# Altium PCB waffling60-MX.PcbDoc (part 2 of 2)
Units mm, origin at the board's own origin, x right, y up, seen from the top; angles counter-clockwise.
Board outline 284.81 x 94.3 mm, 2 copper layers (Component Side, Bottom Layer), stack 1.571 mm thick; 157 components, 101 nets, 791 pads, 59 vias.
Unrouted connection lines stored in the file: 52.
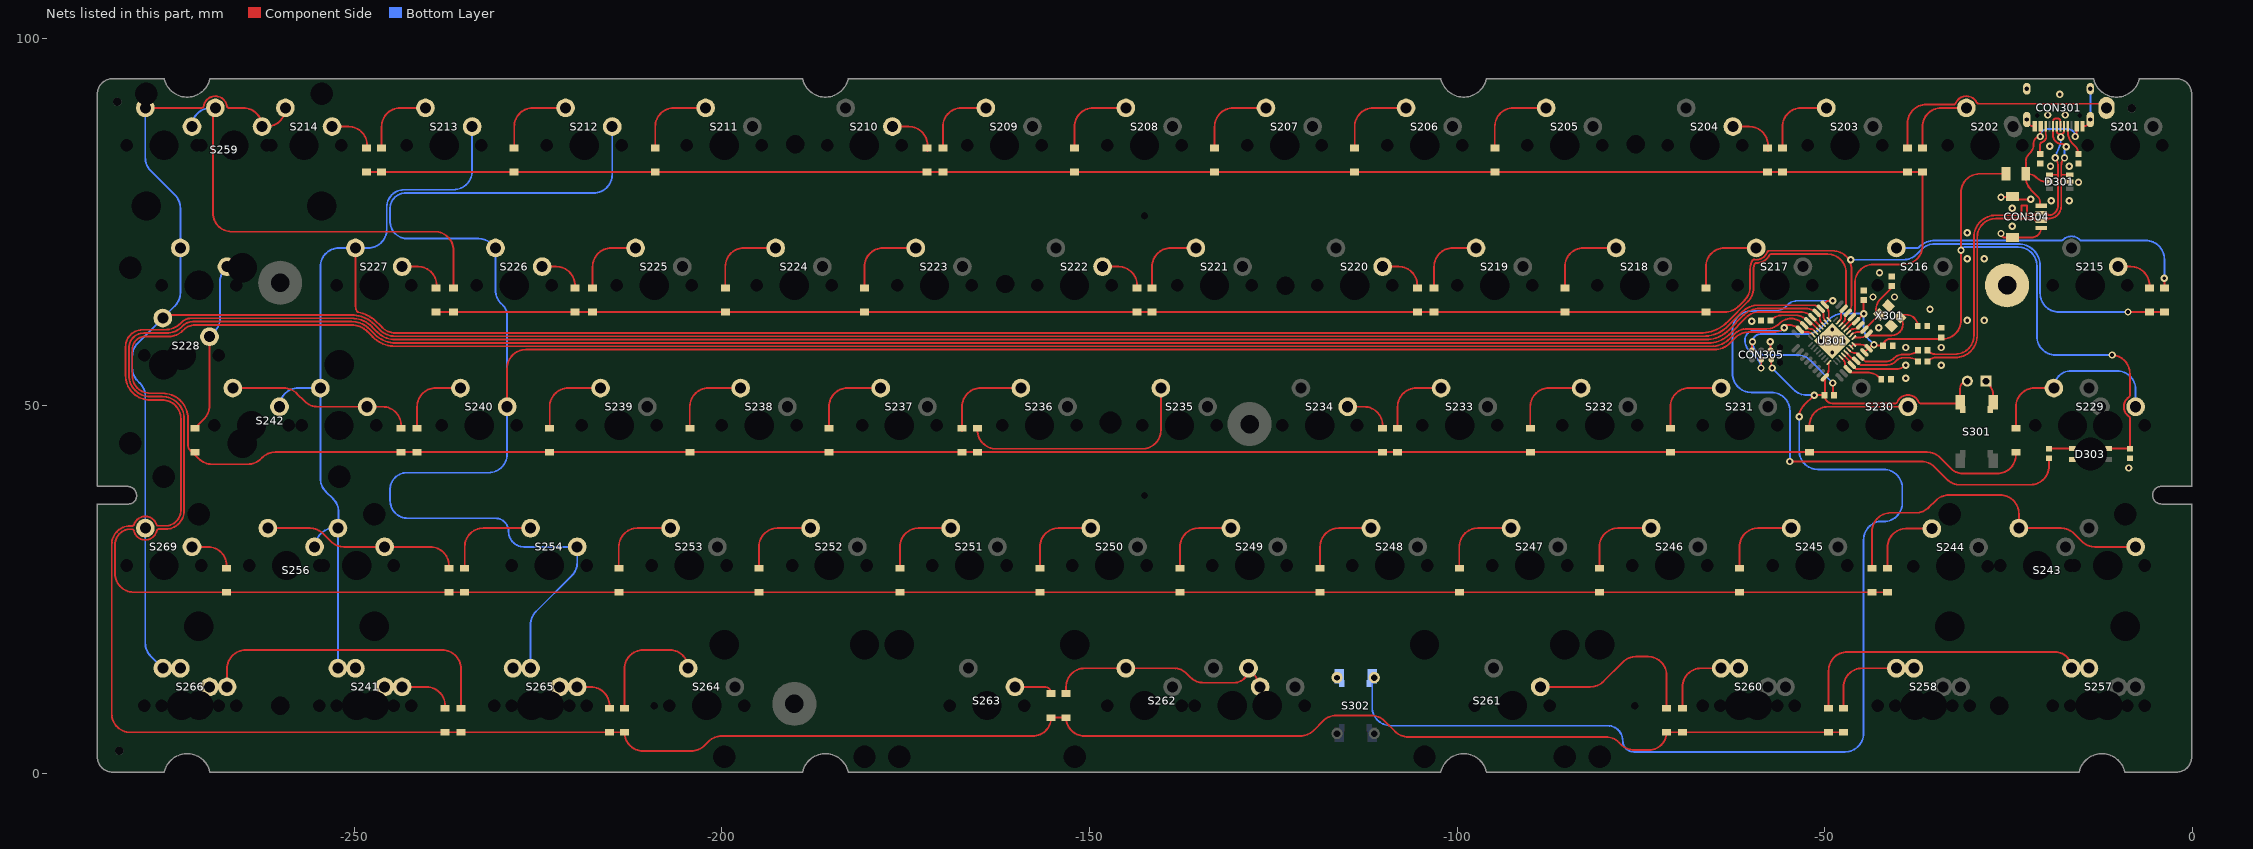
[diagram p2: the nets of this part, all layers, seen from the top]

## Via types
v1: diameter 1, hole 0.5, Component Side to Bottom Layer, tented both sides, 54 vias
v2: diameter 1, hole 0.5, Component Side to Bottom Layer, tented bottom, 5 vias

## Nets (pads, with @x,y where several pads share a name; then routed paths per layer and width w, separated by ;. In a path a pad name is that pad's centre, name@x,y a point inside that pad or via, vN(x,y) a via of type N, cw(c..) or ccw(c..) an arc to the next point about the centre after c; other vN are vias at no path point) (continued)
col12: CON305.3 S212.2 S226.2 S240.2 S254.2 S265.2 U301.15 | length 351.6
  Component Side w0.254: S240.2@-229.177,49.855 -229.177,55.084 cw(c-226.637,55.084) -226.637,57.624 -65.014,57.624 ccw(c-65.014,60.618) -62.898,58.5 ; -62.897,58.501 -62.143,59.255 cw(c-60.349,57.461) -60.349,59.998 -56.902,59.998 ccw(c-56.902,61.982) v1(-55.499,60.579) ; v1(-58.674,55.118) -58.627,55.165 CON305.3@-58.627,56.261 ; v1(-55.499,60.579) cw(c-55.118,60.579) -55.118,60.96 -54.833,60.96 cw(c-54.833,58.889) U301.15@-53.368,60.353 ccw(c-52.555,61.167) -52.555,60.017 -52.324,60.017 cw(c-52.324,59.163) -51.721,59.767 U301.15@-51.565,59.611
  Bottom Layer w0.254: S265.2@-226.002,14.295 -226.002,20.215 cw(c-223.462,20.215) -225.258,22.011 -220.396,26.873 ccw(c-222.192,28.669) -219.652,28.669 S254.2@-219.652,30.805 -226.893,30.805 cw(c-226.893,32.893) -228.981,32.893 ccw(c-230.781,32.893) -230.781,34.693 -242.696,34.693 cw(c-242.696,37.094) -243.383,34.793 cw(c-242.696,37.094) -244.997,36.407 cw(c-242.696,37.094) -245.097,37.094 -245.097,38.598 cw(c-242.808,38.598) -245.033,39.137 cw(c-242.808,38.598) -243.347,40.823 cw(c-242.808,38.598) -242.808,40.887 -231.717,40.887 ccw(c-231.717,43.427) -229.177,43.427 S240.2@-229.177,49.855 -229.177,62.262 ccw(c-231.108,62.262) -229.743,63.627 -230.021,63.905 cw(c-228.225,65.701) -230.765,65.701 S226.2@-230.765,71.445 -231.298,71.978 ccw(c-233.094,70.182) -233.094,72.722 -242.752,72.722 cw(c-242.752,75.067) -243.364,72.803 cw(c-242.752,75.067) -245.016,74.455 cw(c-242.752,75.067) -245.097,75.067 -245.097,76.825 cw(c-243.006,76.825) -245.076,77.123 cw(c-243.006,76.825) -243.304,78.895 cw(c-243.006,76.825) -243.006,78.916 -217.43,78.916 ccw(c-217.43,81.456) -214.89,81.456 S212.2@-214.89,87.955 ; v1(-58.674,55.118) ccw(c-60.497,55.118) -59.208,56.407 -60.245,57.444 cw(c-58.76,58.928) -60.86,58.928 cw(c-59.601,58.928) -59.601,60.187 -55.891,60.187 v1(-55.499,60.579)
col13: S213.2 S227.2 S241.2 S242.2 S256.2 U301.7 | length 329.5
  Component Side w0.254: S227.2@-249.815,71.445 -249.815,63.76 ccw(c-247.523,63.76) -249.631,62.861 ccw(c-249.397,62.96) -249.444,62.71 cw(c-250.332,57.983) -247.314,61.728 ; -247.294,61.747 -246.185,60.638 ccw(c-244.389,62.434) -244.389,59.894 -66.895,59.894 ccw(c-66.895,65.158) -63.172,61.436 -60.434,64.174 ccw(c-62.23,65.97) -59.69,65.97 -59.69,68.526 cw(c-57.604,68.526) -59.569,69.226 cw(c-59.33,69.14) -59.328,69.394 ccw(c-59.315,71.445) -57.506,70.478 cw(c-57.282,70.358) -57.281,70.612 -49.632,70.612 cw(c-49.632,68.072) -47.092,68.072 -47.092,63.995 cw(c-48.242,63.995) -47.428,63.182 ccw(c-46.615,62.369) -47.765,62.369 -47.765,62.103 cw(c-48.535,62.103) -47.991,61.559 U301.7@-48.171,61.379
  Bottom Layer w0.254: S242.2@-260.14,49.855 cw(c-257.6,49.855) -257.6,52.395 S242.2@-254.584,52.395 ; S256.2@-255.27,30.805 cw(c-252.73,30.805) -252.73,33.345 S256.2@-252.095,33.345 ; S241.2@-252.196,14.295 -252.196,33.244 cw(c-252.095,33.244) S256.2@-252.095,33.345 ; S213.2@-233.94,87.955 -233.94,81.91 cw(c-236.48,81.91) -236.48,79.37 -243.194,79.37 ccw(c-243.194,77.013) -243.489,79.351 ccw(c-243.194,77.013) -245.532,77.308 ccw(c-243.194,77.013) -245.551,77.013 -245.551,73.985 cw(c-248.091,73.985) -248.091,71.445 S227.2@-249.815,71.445 -252.044,71.445 ccw(c-252.044,68.905) -254.584,68.905 S242.2@-254.584,52.395 ; S242.2@-254.584,52.395 -254.584,40.117 ccw(c-252.044,40.117) -253.84,38.321 -252.839,37.32 cw(c-254.635,35.524) -252.095,35.524 S256.2@-252.095,33.345
col14: S214.2 S228.2 S259.2 S266.2 S269.2 U301.10 | length 335.5
  Component Side w0.254: S259.2@-278.39,90.495 -272.542,90.495 -270.698,90.495 ccw(c-270.698,90.749) -270.447,90.714 cw(c-268.865,90.495) -270.403,90.924 cw(c-268.865,90.495) -268.362,92.011 cw(c-268.865,90.495) -268.36,92.01 cw(c-268.865,90.495) -267.283,90.714 ccw(c-267.032,90.749) -267.032,90.495 -265.055,90.495 cw(c-265.055,87.955) S259.2@-262.515,87.955 -261.88,87.955 ccw(c-261.88,90.495) S214.2@-259.34,90.495 ; S228.2@-276.009,61.92 -275.59,62.339 -250.332,62.339 cw(c-250.332,57.983) -247.252,61.063 -246.506,60.317 ; -246.505,60.316 ccw(c-244.389,62.434) -244.389,59.44 -66.518,59.44 ccw(c-66.518,64.25) -63.119,60.847 ccw(c-66.518,64.25) -63.117,60.849 -61.209,62.757 ; -61.209,62.757 cw(c-59.017,60.565) -59.017,63.665 -51.706,63.665 cw(c-51.706,62.015) U301.10@-50.54,63.182 cw(c-51.444,62.277) -50.165,62.277 -50.165,62.103 ccw(c-49.304,62.103) -49.913,61.494 U301.10@-49.797,61.379
  Bottom Layer w0.254: S259.2@-278.39,90.495 -278.39,83.735 ccw(c-275.85,83.735) -277.646,81.939 -274.371,78.664 cw(c-276.167,76.868) -273.627,76.868 S228.2@-273.627,71.445 -273.627,65.353 cw(c-276.167,65.353) -274.371,63.557 S228.2@-276.009,61.92 -279.418,58.511 ccw(c-277.622,56.715) -280.162,56.715 -280.162,55.154 ccw(c-277.622,55.154) -279.418,53.358 -279.134,53.074 cw(c-280.93,51.278) -278.39,51.278 S269.2@-278.39,33.345 -278.39,17.729 ccw(c-275.85,17.729) -277.646,15.933 S266.2@-276.008,14.295
D_N: CON301.A7 CON301.B7 CON304.2 D301.4 R305.2 | length 52.4
  Component Side w0.254: R305.2@-36.001,57.531 -35.851,57.381 ccw(c-34.925,58.308) -34.925,56.998 -32.258,56.998 ccw(c-32.258,59.538) -29.718,59.538 -29.718,72.899 cw(c-26.721,72.899) -26.721,75.897 -23.368,75.897 -23.241,75.897 -23.241,77.243 -22.479,77.243 -22.479,75.897 -21.971,75.897 -21.476,75.897 cw(c-21.205,75.897) -21.205,76.168 CON304.2@-20.574,76.168 -19.943,76.168 cw(c-19.943,75.897) -19.672,75.897 -19.558,75.897 ccw(c-19.558,77.167) -18.288,77.167 -18.288,81.407 -18.29,81.405 ; D301.4@-19.431,81.402 -18.293,81.402 -18.29,81.405 ; v1(-18.669,83.693) cw(c-19.583,82.779) -18.29,82.779 -18.29,81.405 ; CON301.A7@-18.45,88 cw(c-18.681,87.894) -18.427,87.894 -18.427,87.275 ccw(c-18.1,87.275) -18.427,87.265 ccw(c-18.1,87.275) v1@-18.134,86.95 ; v1@-17.907,86.36 v1(-17.907,86.528) -17.907,86.696 ccw(c-18.161,86.697) v1@-18.133,86.95 ; CON301.B7@-17.45,88 -17.473,87.265 cw(c-17.8,87.275) -17.8,86.948 -18.1,86.948 cw(c-18.1,87.275) v1@-18.133,86.95
  Bottom Layer w0.254: v1(-18.669,83.693) v1@-18.651,83.711 ; v1@-18.65,83.712 ccw(c-18.832,83.89) -18.585,83.829 -18.457,84.339 -17.928,85.566 ccw(c-18.161,85.666) -17.907,85.666 v1(-17.907,86.528)
D_P: CON301.A6 CON301.B6 CON304.3 D301.3 R306.2 | length 52.4
  Component Side w0.254: R306.2@-36.001,56.007 -35.851,56.157 cw(c-34.925,55.23) -34.925,56.54 -32.258,56.54 ccw(c-32.258,59.538) -29.261,59.538 -29.261,72.899 cw(c-26.721,72.899) -26.721,75.439 -21.476,75.439 ccw(c-21.205,75.439) -21.205,75.168 CON304.3@-20.574,75.168 -19.943,75.168 ccw(c-19.943,75.439) -19.672,75.439 -19.558,75.439 ccw(c-19.558,77.167) -17.831,77.167 -17.831,81.407 ; CON301.A6@-17.95,88 -17.973,88.735 ccw(c-18.3,88.725) -18.3,89.052 -18.6,89.052 ccw(c-18.6,88.725) -18.927,88.735 CON301.B6@-18.95,88 -18.95,86.768 ccw(c-17.78,86.768) -17.78,85.598 cw(c-17.78,84.372) -16.913,85.239 v1@-16.891,85.217 ; v1(-17.399,83.693) ccw(c-16.351,82.645) -17.833,82.645 -17.833,81.409 -17.831,81.407 ; D301.3@-16.681,81.402 -17.826,81.402 -17.831,81.407
  Bottom Layer w0.254: v1(-17.399,83.693) -17.399,84.604 cw(c-16.532,84.604) v1(-17.145,85.217)
D_PRE_N: R305.1 U301.30 | length 10.5
  Component Side w0.254: U301.30@-46.757,57.631 -46.579,57.453 ccw(c-45.847,58.185) -45.847,57.15 cw(c-45.847,56.648) -45.492,57.003 U301.30@-45.166,56.676 -44.496,56.007 -41.704,56.007 ccw(c-41.704,57.655) -40.538,56.49 cw(c-39.373,55.324) -39.373,56.972 -38.65,56.972 ccw(c-38.65,58.88) R305.1@-37.301,57.531
D_PRE_P: R306.1 U301.29 | length 10.9
  Component Side w0.254: U301.29@-47.11,57.277 -46.093,56.261 ccw(c-45.731,56.623) U301.29@-45.731,56.111 -45.17,55.55 -41.514,55.55 ccw(c-41.514,57.198) -40.349,56.032 -40.215,56.166 cw(c-39.373,55.325) -39.373,56.515 -38.527,56.515 cw(c-38.527,54.781) R306.1@-37.301,56.007
GND: C301.1 C302.1 C303.1 C304.1 C305.1 C306.1 C307.1 CON301.A1B12 CON301.B1A12 CON301.S1 CON303.1 CON304.4 CON304.5 CON305.6 D301.2 D303.3 pad.@-25.2,66.365 R302.2 R303.2 R304.2 S301.1 S302.1 U301.3 U301.28 X301.2 X301.4 | length 33.4
  Component Side w0.254: CON305.6@-57.357,57.531 v1@-57.357,58.213 ; U301.28@-47.464,56.924 U301.28@-46.447,55.907 ; U301.3@-46.757,59.964 -46.388,60.333 cw(c-46.101,60.046) -46.101,60.452 ccw(c-46.101,61.583) -45.302,60.783 U301.3@-45.166,60.919 ; U301.28@-46.447,55.907 cw(c-46.809,55.545) U301.28@-46.297,55.545 -45.737,54.985 -40.229,54.985 ccw(c-40.229,56.739) v1(-38.989,55.499) ; CON303.1@-28.067,53.34 -27.831,53.104 cw(c-29.627,51.308) -27.087,51.308 S301.1@-27.087,50.457 ; v1(-26.035,73.406) ccw(c-25.497,73.406) -25.497,72.868 CON304.5@-24.449,72.868 -21.874,72.868 ccw(c-21.874,74.168) CON304.4@-20.574,74.168 ; v1(-26.035,78.359) -24.558,78.359 ccw(c-24.253,78.359) -24.253,78.054 v1(-21.971,78.054) ; CON301.S1@-22.52,88.915 ccw(c-21.605,88.915) -21.605,88 CON301.B1A12@-21.45,88 ; CON301.A1B12@-14.95,88 -14.795,88 ccw(c-14.795,88.915) CON301.S1@-13.88,88.915
  Bottom Layer w0.254: CON301.S1@-13.88,88.915 CON301.S1@-13.88,93.095
  other v1: -8.636,41.529 -38.989,53.721 -34.163,55.499 -38.989,57.912 -34.163,57.912 -57.404,58.674 -42.672,60.579 -59.944,61.468 -30.607,61.595 -28.321,61.595 -35.687,63.119 -43.434,64.77 -40.513,64.77 -42.545,68.072 -30.607,69.977 -28.321,69.977 -30.607,73.533 -24.511,74.422 -24.511,76.835 -19.177,77.851 -16.764,77.851 -15.494,80.391 -19.304,82.55 -16.764,82.55 -19.379,85.301 -19.685,89.535 -17.272,89.535 -18.034,92.329
  other v2: -48.984,57.242 -50.54,58.798 -48.984,58.798 -47.428,58.798 -48.984,60.353
LED: R307.2 U301.9 | length 81.7
  Component Side w0.254: v1(-54.737,42.418) -36.873,42.418 cw(c-36.873,39.878) -35.077,41.674 -33.39,39.987 ccw(c-31.594,41.783) -31.594,39.243 -22.04,39.243 ccw(c-22.04,41.783) -19.5,41.783 R307.2@-19.5,42.85 R307.2@-19.761,42.85 ; U301.9@-49.444,61.732 -49.444,62.467 ccw(c-51.254,62.467) U301.9@-49.974,63.747 cw(c-49.459,63.747) -49.459,64.262 v1(-48.895,64.262)
  Bottom Layer w0.254: v1(-54.737,42.418) -54.737,49.276 ccw(c-57.277,49.276) -57.277,51.816 -59.998,51.816 cw(c-59.998,54.356) -62.538,54.356 -62.538,60.325 cw(c-59.998,60.325) -59.998,62.865 -56.932,62.865 ccw(c-56.932,65.405) -55.136,63.609 -54.991,63.754 cw(c-53.765,62.528) -53.765,64.262 v1(-48.895,64.262)
NetC301_2: C301.2 U301.27 | length 6.9
  Component Side w0.254: U301.27@-47.817,56.57 -47.417,56.17 cw(c-47.833,55.753) -47.244,55.753 ccw(c-46.297,55.753) -46.967,55.083 U301.27@-46.863,54.979 -46.414,54.531 -44.295,54.531 cw(c-44.295,51.991) -44.236,54.53 cw(c-44.295,51.991) -42.499,53.787 C301.2@-42.306,53.594
NetC305_2: C305.2 U301.2 X301.3 | length 9.8
  Component Side w0.254: U301.2@-46.403,59.611 -46.373,59.641 cw(c-45.466,58.734) -45.466,60.017 -45.413,60.017 ccw(c-45.413,61.167) U301.2@-44.6,60.353 -42.571,62.363 X301.3@-42.527,62.407 cw(c-42.527,62.933) -43.053,62.933 cw(c-40.764,62.933) -42.383,64.551 -41.023,65.911 ccw(c-41.336,66.223) C305.2@-40.894,66.223
NetC306_2: C306.2 U301.1 X301.1 | length 12.4
  Component Side w0.254: U301.1@-46.05,59.257 -45.315,59.257 ccw(c-45.315,61.068) U301.1@-44.034,59.788 ccw(c-43.81,59.788) -43.81,59.563 -40.897,59.563 ccw(c-40.897,61.09) -39.37,61.09 ccw(c-40.733,61.09) X301.1@-39.769,62.053 ; X301.1@-39.769,62.053 cw(c-39.465,62.053) -39.465,62.357 -38.877,62.357 cw(c-38.877,60.833) C306.2@-37.353,60.833
NetCON301_A5: CON301.A5 R303.1 | length 4.2
  Component Side w0.254: CON301.A5@-16.95,88 -16.95,87.344 ccw(c-14.41,87.344) -16.206,85.548 -15.932,85.274 cw(c-16.991,84.216) R303.1@-15.494,84.216
NetCON301_B5: CON301.B5 R304.1 | length 4.2
  Component Side w0.254: R304.1@-20.701,84.216 -20.701,85.539 cw(c-20.394,85.539) -20.66,85.691 cw(c-20.44,85.565) -20.502,85.811 ccw(c-20.701,86.614) -20.394,85.846 ccw(c-20.701,86.614) -19.932,86.919 cw(c-19.696,87.012) -19.95,87.012 CON301.B5@-19.95,88
NetD201_1: D201.1 S201.1 | length 33.7
  Component Side w0.254: D201.1@-38.735,85.05 -38.735,88.409 cw(c-36.195,88.409) -36.195,90.949 -33.528,90.949 -32.45,90.949 ccw(c-32.45,91.203) -32.216,91.106 cw(c-30.74,90.495) -29.307,91.201 ; -29.733,91.734 cw(c-30.74,90.495) -29.307,91.201 ; S201.1@-11.69,90.495 ccw(c-12.254,90.495) -12.254,91.059 -24.384,91.059 -29.08,91.059 cw(c-29.08,91.313) -29.307,91.199 cw(c-29.08,91.313) -29.307,91.201
NetD202_1: D202.1 S202.1 | length 10.3
  Component Side w0.254: D202.1@-36.703,85.05 -36.703,87.955 cw(c-34.163,87.955) -34.163,90.495 S202.1@-30.74,90.495
NetD203_1: D203.1 S203.1 | length 10.3
  Component Side w0.254: D203.1@-55.753,85.05 -55.753,87.955 cw(c-53.213,87.955) -53.213,90.495 S203.1@-49.79,90.495
NetD204_1: D204.1 S204.1 | length 7
  Component Side w0.254: S204.1@-62.49,87.955 -60.259,87.955 cw(c-60.259,85.415) -57.719,85.415 -57.719,85.05 D204.1@-57.719,84.615
NetD205_1: D205.1 S205.1 | length 11.3
  Component Side w0.254: D205.1@-94.869,85.05 -94.869,87.955 cw(c-92.329,87.955) -92.329,90.495 S205.1@-87.89,90.495
NetD206_1: D206.1 S206.1 | length 11.3
  Component Side w0.254: D206.1@-113.919,85.05 -113.919,87.955 cw(c-111.379,87.955) -111.379,90.495 S206.1@-106.94,90.495
NetD207_1: D207.1 S207.1 | length 11.3
  Component Side w0.254: D207.1@-132.969,85.05 -132.969,87.955 cw(c-130.429,87.955) -130.429,90.495 S207.1@-125.99,90.495
NetD208_1: D208.1 S208.1 | length 11.3
  Component Side w0.254: D208.1@-152.019,85.05 -152.019,87.955 cw(c-149.479,87.955) -149.479,90.495 S208.1@-145.04,90.495
NetD209_1: D209.1 S209.1 | length 10.2
  Component Side w0.254: D209.1@-169.926,85.05 -169.926,87.955 cw(c-167.386,87.955) -167.386,90.495 S209.1@-164.09,90.495
NetD210_1: D210.1 S210.1 | length 7.1
  Component Side w0.254: S210.1@-176.75,87.915 S210.1@-176.79,87.955 -174.559,87.955 cw(c-174.559,85.415) -172.019,85.415 -172.019,85.05 D210.1@-172.019,84.615
NetD211_1: D211.1 S211.1 | length 11.2
  Component Side w0.254: D211.1@-209.042,85.05 -209.042,87.955 cw(c-206.502,87.955) -206.502,90.495 S211.1@-202.19,90.495
NetD212_1: D212.1 S212.1 | length 11.3
  Component Side w0.254: D212.1@-228.219,85.05 -228.219,87.955 cw(c-225.679,87.955) -225.679,90.495 S212.1@-221.24,90.495
NetD213_1: D213.1 S213.1 | length 10.3
  Component Side w0.254: D213.1@-246.253,85.05 -246.253,87.955 cw(c-243.713,87.955) -243.713,90.495 S213.1@-240.29,90.495
NetD214_1: D214.1 S214.1 | length 6.6
  Component Side w0.254: S214.1@-252.99,87.955 -250.759,87.955 cw(c-250.759,85.415) -248.219,85.415 D214.1@-248.219,85.05
NetD215_1: D215.1 S215.1 | length 6.1
  Component Side w0.254: S215.1@-10.102,68.905 -8.382,68.905 cw(c-8.382,66.365) -5.842,66.365 D215.1@-5.842,66
NetD216_1: D216.1 S216.1 | length 42.4
  Component Side w0.254: D216.1@-3.81,66 v1(-3.81,67.31)
  Bottom Layer w0.254: S216.1@-40.265,71.445 -37.379,71.445 ccw(c-37.379,71.699) -37.2,71.519 -37.134,71.585 cw(c-35.016,69.469) -35.016,72.463 -24.765,72.463 -17.797,72.463 ccw(c-17.797,72.717) -17.613,72.542 cw(c-16.452,71.445) -15.292,72.542 ccw(c-15.108,72.717) -15.108,72.463 -6.35,72.463 cw(c-6.35,69.923) -3.81,69.923 v1(-3.81,67.31)
NetD217_1: D217.1 S217.1 | length 11.2
  Component Side w0.254: D217.1@-66.167,66 -66.167,68.905 cw(c-63.627,68.905) -63.627,71.445 S217.1@-59.315,71.445
NetD218_1: D218.1 S218.1 | length 11.3
  Component Side w0.254: D218.1@-85.344,66 -85.344,68.905 cw(c-82.804,68.905) -82.804,71.445 S218.1@-78.365,71.445
NetD219_1: D219.1 S219.1 | length 10.1
  Component Side w0.254: D219.1@-103.124,66 -103.124,68.905 cw(c-100.584,68.905) -100.584,71.445 S219.1@-97.415,71.445
NetD220_1: D220.1 S220.1 | length 6.5
  Component Side w0.254: S220.1@-110.115,68.905 -107.95,68.905 cw(c-107.95,66.365) -105.41,66.365 D220.1@-105.41,66
NetD221_1: D221.1 S221.1 | length 10.3
  Component Side w0.254: D221.1@-141.478,66 -141.478,68.905 cw(c-138.938,68.905) -138.938,71.445 S221.1@-135.515,71.445
NetD222_1: D222.1 S222.1 | length 6.5
  Component Side w0.254: S222.1@-148.215,68.905 -146.05,68.905 cw(c-146.05,66.365) -143.51,66.365 D222.1@-143.51,66
NetD223_1: D223.1 S223.1 | length 11.3
  Component Side w0.254: D223.1@-180.594,66 -180.594,68.905 cw(c-178.054,68.905) -178.054,71.445 S223.1@-173.615,71.445
NetD224_1: D224.1 S224.1 | length 11.2
  Component Side w0.254: D224.1@-199.517,66 -199.517,68.905 cw(c-196.977,68.905) -196.977,71.445 S224.1@-192.665,71.445
NetD225_1: D225.1 S225.1 | length 10.2
  Component Side w0.254: D225.1@-217.551,66 -217.551,68.905 cw(c-215.011,68.905) -215.011,71.445 S225.1@-211.715,71.445
NetD226_1: D226.1 S226.1 | length 6.3
  Component Side w0.254: S226.1@-224.415,68.905 -222.504,68.905 cw(c-222.504,66.365) -219.964,66.365 D226.1@-219.964,66
NetD227_1: D227.1 S227.1 | length 6.5
  Component Side w0.254: S227.1@-243.465,68.905 -241.3,68.905 cw(c-241.3,66.365) -238.76,66.365 D227.1@-238.76,66
NetD228_1: D228.1 S259.1 | length 60
  Component Side w0.254: S259.1@-269.5,90.495 -269.182,90.495 -269.182,76.2 ccw(c-266.642,76.2) -266.642,73.66 -239.014,73.66 cw(c-239.014,71.12) -236.474,71.12 D228.1@-236.474,66
  Bottom Layer w0.254: S259.1@-272.04,87.955 cw(c-269.5,87.955) -269.5,90.495 S259.1@-268.865,90.495
NetD229_1: D229.1 S229.1 | length 25.8
  Component Side w0.254: D229.1@-24.003,46.95 -24.003,49.855 cw(c-21.463,49.855) -21.463,52.395 S229.1@-18.834,52.395
  Bottom Layer w0.254: S229.1@-18.834,52.395 cw(c-16.492,52.395) -16.492,54.737 -10.261,54.737 cw(c-10.261,52.197) -7.721,52.197 S229.1@-7.721,49.855
NetD230_1: D230.1 S230.1 | length 15.2
  Component Side w0.254: D230.1@-52.07,46.95 -52.07,47.315 cw(c-49.53,47.315) -49.53,49.855 S230.1@-38.677,49.855
NetD231_1: D231.1 S231.1 | length 11.3
  Component Side w0.254: D231.1@-70.993,46.95 -70.993,49.855 cw(c-68.453,49.855) -68.453,52.395 S231.1@-64.077,52.395
NetD232_1: D232.1 S232.1 | length 11.3
  Component Side w0.254: D232.1@-90.043,46.95 -90.043,49.855 cw(c-87.503,49.855) -87.503,52.395 S232.1@-83.127,52.395
NetD233_1: D233.1 S233.1 | length 10.3
  Component Side w0.254: D233.1@-108.077,46.95 -108.077,49.855 cw(c-105.537,49.855) -105.537,52.395 S233.1@-102.177,52.395
NetD234_1: D234.1 S234.1 | length 6.6
  Component Side w0.254: S234.1@-114.877,49.855 -112.649,49.855 cw(c-112.649,47.315) -110.109,47.315 D234.1@-110.109,46.95
NetD235_1: D235.1 S235.1 | length 33.8
  Component Side w0.254: D235.1@-165.227,46.95 -165.227,46.674 ccw(c-162.687,46.674) -162.687,44.134 -142.817,44.134 ccw(c-142.817,46.674) -140.277,46.674 S235.1@-140.277,52.395
NetD236_1: D236.1 S236.1 | length 12.8
  Component Side w0.254: D236.1@-167.32,46.515 D236.1@-167.32,46.95 -167.32,49.855 cw(c-164.78,49.855) -164.78,52.395 S236.1@-159.327,52.395
NetD237_1: D237.1 S237.1 | length 11.4
  Component Side w0.254: D237.1@-185.42,46.95 -185.42,49.855 cw(c-182.88,49.855) -182.88,52.395 S237.1@-178.377,52.395
NetD238_1: D238.1 S238.1 | length 10.8
  Component Side w0.254: D238.1@-204.343,46.95 -204.343,49.855 cw(c-201.803,49.855) -201.803,52.395 S238.1@-197.881,52.395
NetD239_1: D239.1 S239.1 | length 11.3
  Component Side w0.254: D239.1@-223.393,46.95 -223.393,49.855 cw(c-220.853,49.855) -220.853,52.395 S239.1@-216.477,52.395
NetD240_1: D240.1 S240.1 | length 10.3
  Component Side w0.254: D240.1@-241.427,46.95 -241.427,49.855 cw(c-238.887,49.855) -238.887,52.395 S240.1@-235.527,52.395
NetD241_1: D241.1 S242.1 | length 25.6
  Component Side w0.254: S242.1@-266.49,52.395 -259.568,52.395 cw(c-259.568,49.855) -257.772,51.651 -256.72,50.599 ccw(c-254.924,52.395) -254.924,49.855 S242.1@-248.234,49.855 -246.126,49.855 cw(c-246.126,47.315) -243.586,47.315 D241.1@-243.586,46.95
NetD242_1: D242.1 S228.1 | length 23.4
  Component Side w0.254: D242.1@-271.653,46.95 -270.403,48.2 ccw(c-272.199,49.996) -269.659,49.996 S228.1@-269.659,59.38
  Bottom Layer w0.254: S228.1@-269.659,59.38 -268.968,60.071 ccw(c-270.764,61.867) -268.224,61.867 -268.224,66.906 cw(c-265.684,66.906) -267.48,68.702 S228.1@-267.277,68.905
NetD243_1: D243.1 S243.1 | length 47.3
  Component Side w0.254: D243.1@-43.561,27.9 -43.561,32.893 cw(c-41.021,32.893) -41.021,35.433 -37.628,35.433 ccw(c-37.628,37.973) -35.832,36.177 -34.907,37.102 cw(c-33.111,35.306) -33.111,37.846 -26.136,37.846 cw(c-26.136,35.306) -23.596,35.306 S243.1@-23.596,33.345 -17.887,33.345 cw(c-17.887,30.805) -16.091,32.601 -15.039,31.549 ccw(c-13.243,33.345) -13.243,30.805 S243.1@-7.721,30.805
NetD244_1: D244.1 S244.2 | length 10.3
  Component Side w0.254: D244.1@-41.468,27.9 -41.468,30.734 cw(c-38.928,30.734) -38.928,33.274 S244.2@-35.433,33.274
NetD245_1: D245.1 S245.1 | length 11.4
  Component Side w0.254: D245.1@-61.595,27.9 -61.595,30.805 cw(c-59.055,30.805) -59.055,33.345 S245.1@-54.552,33.345
NetD246_1: D246.1 S246.1 | length 11.4
  Component Side w0.254: D246.1@-80.645,27.9 -80.645,30.805 cw(c-78.105,30.805) -78.105,33.345 S246.1@-73.602,33.345
NetD247_1: D247.1 S247.1 | length 11.4
  Component Side w0.254: D247.1@-99.695,27.9 -99.695,30.805 cw(c-97.155,30.805) -97.155,33.345 S247.1@-92.652,33.345
NetD248_1: D248.1 S248.1 | length 11.3
  Component Side w0.254: D248.1@-118.618,27.9 -118.618,30.805 cw(c-116.078,30.805) -116.078,33.345 S248.1@-111.702,33.345
NetD249_1: D249.1 S249.1 | length 11.3
  Component Side w0.254: D249.1@-137.668,27.9 -137.668,30.805 cw(c-135.128,30.805) -135.128,33.345 S249.1@-130.752,33.345
NetD250_1: D250.1 S250.1 | length 11.3
  Component Side w0.254: D250.1@-156.718,27.9 -156.718,30.805 cw(c-154.178,30.805) -154.178,33.345 S250.1@-149.802,33.345
NetD251_1: D251.1 S251.1 | length 11.3
  Component Side w0.254: D251.1@-175.768,27.9 -175.768,30.805 cw(c-173.228,30.805) -173.228,33.345 S251.1@-168.852,33.345
NetD252_1: D252.1 S252.1 | length 11.4
  Component Side w0.254: D252.1@-194.945,27.9 -194.945,30.805 cw(c-192.405,30.805) -192.405,33.345 S252.1@-187.902,33.345
NetD253_1: D253.1 S253.1 | length 11.4
  Component Side w0.254: D253.1@-213.995,27.9 -213.995,30.805 cw(c-211.455,30.805) -211.455,33.345 S253.1@-206.952,33.345
NetD254_1: D254.1 S254.1 | length 13.3
  Component Side w0.254: D254.1@-234.95,27.9 -234.95,30.805 cw(c-232.41,30.805) -232.41,33.345 S254.1@-226.002,33.345
NetD255_1: D255.1 S256.1 | length 27.2
  Component Side w0.254: S256.1@-261.62,33.345 -256.012,33.345 cw(c-256.012,30.805) -254.216,32.601 -253.164,31.549 ccw(c-251.368,33.345) -251.368,30.805 -245.745,30.805 -239.649,30.805 cw(c-239.649,28.265) -237.109,28.265 D255.1@-237.109,27.9
NetD256_1: D256.1 S269.1 | length 6.5
  Component Side w0.254: S269.1@-272.04,30.805 -269.875,30.805 cw(c-269.875,28.265) -267.335,28.265 D256.1@-267.335,27.9
NetD257_1: D257.1 S257.2 | length 40.9
  Component Side w0.254: D257.1@-49.469,8.85 -49.469,13.97 cw(c-46.929,13.97) -46.929,16.51 -18.667,16.51 cw(c-18.667,14.295) S257.2@-16.452,14.295
NetD258_1: D258.1 S258.2 | length 11.5
  Component Side w0.254: D258.1@-47.437,8.85 -47.437,11.755 cw(c-44.897,11.755) -44.897,14.295 S258.2@-40.264,14.295
NetD259_1: D259.1 S260.2 | length 9.6
  Component Side w0.254: D259.1@-69.342,8.85 -69.342,11.755 cw(c-66.802,11.755) -66.802,14.295 S260.2@-64.077,14.295
NetD260_1: D260.1 S261.1 | length 24.6
  Component Side w0.254: S261.1@-88.683,11.755 -81.88,11.755 ccw(c-81.88,14.295) -80.084,12.499 -77.452,15.131 cw(c-75.656,13.335) -75.656,15.875 -74.041,15.875 cw(c-74.041,13.335) -71.501,13.335 D260.1@-71.501,8.85
NetD261_1: D261.1 S262.2 | length 32.2
  Component Side w0.254: D261.1@-153.162,10.85 -153.162,11.755 cw(c-150.622,11.755) -150.622,14.295 S262.2@-145.039,14.295 -138.537,14.295 cw(c-138.537,11.755) -136.741,13.551 -136.253,13.063 ccw(c-134.457,14.859) -134.457,12.319 -130.339,12.319 ccw(c-130.339,14.295) S262.2@-128.363,14.295 -127.837,13.769 cw(c-129.633,11.973) -127.093,11.973 S262.2@-127.093,11.755
  Bottom Layer w0.254: S262.2@-145.039,14.295 S262.2@-145.039,14.478 ; S262.2@-128.363,14.295 S262.2@-128.363,14.478
NetD262_1: D262.1 S263.1 | length 5.4
  Component Side w0.254: S263.1@-160.121,11.755 -156.099,11.755 cw(c-156.099,10.85) D262.1@-155.194,10.85
NetD263_1: D263.1 S264.1 | length 16.9
  Component Side w0.254: D263.1@-213.233,8.85 -213.233,14.224 cw(c-210.693,14.224) -210.693,16.764 -207.04,16.764 cw(c-207.04,14.295) S264.1@-204.571,14.295
NetD264_1: D264.1 S265.1 | length 6.2
  Component Side w0.254: S265.1@-219.652,11.755 -217.805,11.755 cw(c-217.805,9.215) -215.265,9.215 D264.1@-215.265,8.85
NetD265_1: D265.1 S241.1 | length 7.7
  Component Side w0.254: S241.1@-243.464,11.755 -240.157,11.755 cw(c-240.157,9.215) -237.617,9.215 D265.1@-237.617,8.85
NetD266_1: D266.1 S266.1 | length 42.6
  Component Side w0.254: S266.1@-267.277,11.755 -267.277,14.224 cw(c-264.737,14.224) -264.737,16.764 -237.998,16.764 cw(c-237.998,14.224) -235.458,14.224 D266.1@-235.458,8.85
NetD303_4: D303.4 R307.1 | length 3.4
  Component Side w0.254: R307.1@-19.558,44.084 cw(c-19.346,43.872) -19.346,44.172 D303.4@-16.157,44.172
NetR302_1: R302.1 U301.13 | length 7.4
  Component Side w0.254: R302.1@-57.389,61.595 cw(c-55.68,59.886) -55.687,62.303 cw(c-55.68,59.886) -55.68,62.303 -54.107,62.303 cw(c-54.107,59.763) -52.311,61.559 U301.13@-52.237,61.485 cw(c-52.237,60.973) -51.875,61.335 U301.13@-50.858,60.318
RAW: CON301.A4B9 CON301.B4A9 CON304.1 D301.5 F301.2 | length 23.4
  Component Side w0.254: -20.701,77.47 -20.701,77.658 ccw(c-21.78,77.658) -21.017,78.421 -21.909,79.313 cw(c-20.113,81.109) -22.653,81.109 F301.2@-22.653,81.534 ; CON301.B4A9@-20.65,88 -20.65,86.665 cw(c-20.701,86.665) v1(-20.701,86.614) ccw(c-20.701,85.725) -21.59,85.725 -21.59,85.544 cw(c-23.218,85.544) -22.067,84.393 cw(c-23.145,85.121) -22.225,84.201 ccw(c-21.192,83.168) -22.653,83.168 F301.2@-22.653,81.534 ; D301.5@-19.431,80.452 -19.823,80.452 cw(c-19.823,82.412) -21.209,81.026 ccw(c-22.435,79.8) -22.435,81.534 F301.2@-22.653,81.534 ; v1(-15.938,86.614) -16.002,86.614 -16.129,86.487 ccw(c-16.129,86.866) -15.75,86.866 CON301.A4B9@-15.75,88
  Bottom Layer w0.254: v1(-20.701,86.614) cw(c-19.685,86.614) -19.685,87.63 -16.954,87.63 cw(c-16.954,86.614) v1(-15.938,86.614)
row1: D201.2 D202.2 D203.2 D204.2 D205.2 D206.2 D207.2 D208.2 D209.2 D210.2 D211.2 D212.2 D213.2 D214.2 U301.5 | length 240.3
  Component Side w0.254: D214.2@-248.285,81.78 D213.2@-246.253,81.78 D212.2@-228.219,81.78 D211.2@-209.042,81.78 D210.2@-172.085,81.78 D209.2@-169.926,81.78 D208.2@-152.019,81.78 D207.2@-132.969,81.78 D206.2@-113.919,81.78 D205.2@-94.869,81.78 D204.2@-57.785,81.78 D203.2@-55.753,81.78 D201.2@-38.735,81.78 D202.2@-36.703,81.78 -36.703,71.755 cw(c-39.243,71.755) -39.243,69.215 -43.361,69.215 ccw(c-43.361,66.675) -45.901,66.675 -45.901,63.006 cw(c-47.253,63.006) U301.5@-46.297,62.051 ; U301.5@-47.464,60.672 -46.447,61.688 ccw(c-46.809,62.05) U301.5@-46.297,62.05
row2: D215.2 D216.2 D217.2 D218.2 D219.2 D220.2 D221.2 D222.2 D223.2 D224.2 D225.2 D226.2 D227.2 D228.2 U301.6 | length 257.8
  Component Side w0.254: D227.2@-238.76,62.73 D224.2@-199.517,62.73 D223.2@-180.594,62.73 D222.2@-143.51,62.73 D221.2@-141.478,62.73 D220.2@-105.41,62.73 D219.2@-103.124,62.73 D218.2@-85.344,62.73 D217.2@-66.167,62.73 -63.572,62.73 ccw(c-63.572,65.27) -61.776,63.474 -60.894,64.356 ccw(c-62.705,66.167) -60.144,66.167 -60.144,68.526 cw(c-57.604,68.526) -59.835,69.741 cw(c-59.612,69.618) -59.572,69.869 ccw(c-59.315,71.445) -57.814,70.9 cw(c-57.575,70.814) -57.604,71.066 -48.895,71.066 cw(c-48.895,68.526) -46.355,68.526 -46.355,63.842 cw(c-48.088,63.842) -46.534,63.075 cw(c-48.088,63.842) -46.751,62.739 cw(c-48.088,63.842) U301.6@-46.863,62.616 -46.881,62.597 ccw(c-46.006,61.722) -47.244,61.722 cw(c-47.542,61.722) -47.331,61.511 U301.6@-47.817,61.025 ; v1(-8.763,62.738) -8.755,62.73 D215.2@-5.842,62.73 D216.2@-3.81,62.73
  Bottom Layer w0.254: v1(-46.482,69.85) -40.266,69.848 ccw(c-40.265,71.445) -40.262,69.848 -39.281,69.85 cw(c-39.279,69.596) -39.279,69.85 ccw(c-39.279,72.39) -37.483,70.594 -36.812,71.265 cw(c-35.016,69.469) -35.016,72.009 -23.695,72.009 cw(c-23.695,69.015) -20.701,69.015 -20.701,65.278 ccw(c-18.161,65.278) -18.161,62.738 v1(-8.763,62.738)
row3: D229.2 D230.2 D231.2 D232.2 D233.2 D234.2 D235.2 D236.2 D237.2 D238.2 D239.2 D240.2 D241.2 D242.2 U301.14 | length 504.7
  Component Side w0.254: D242.2@-271.653,43.68 cw(c-271.653,44.617) D242.2@-272.163,43.831 ; -248.216,60.101 ccw(c-250.332,57.983) -250.332,60.977 -271.603,60.977 ccw(c-271.603,58.751) -273.177,60.325 -273.343,60.159 cw(c-275.139,61.955) -275.139,59.415 -278.405,59.415 ccw(c-278.405,57.658) -280.162,57.658 -280.162,54.102 ccw(c-277.749,54.102) -277.749,51.689 -276.038,51.689 cw(c-276.038,48.241) -272.59,48.241 -272.59,44.617 ccw(c-271.653,44.617) -272.439,44.107 ccw(c-271.653,44.617) D242.2@-272.163,43.831 ; -248.215,60.1 -247.469,59.354 ccw(c-244.389,62.434) -244.389,58.078 -65.39,58.078 ccw(c-65.39,61.526) -62.952,59.088 -62.331,59.709 cw(c-60.537,57.915) -60.537,60.452 -57.884,60.452 ccw(c-57.884,62.837) -56.198,61.151 cw(c-54.511,59.464) -54.511,61.849 cw(c-54.511,59.969) -53.182,61.298 U301.14@-52.802,60.919 -52.613,60.729 ccw(c-51.943,61.399) -51.943,60.452 cw(c-51.943,59.863) -51.526,60.279 U301.14@-51.211,59.964 ; D229.2@-24.003,43.68 -24.003,43.307 cw(c-26.543,43.307) -26.543,40.767 -31.233,40.767 cw(c-31.233,42.935) -32.766,41.402 -34.3,42.936 ccw(c-36.096,41.14) -36.096,43.68 D230.2@-52.07,43.68 D231.2@-70.993,43.68 D232.2@-90.043,43.68 D233.2@-108.077,43.68 D234.2@-110.109,43.68 D235.2@-165.227,43.68 D236.2@-167.32,43.68 D237.2@-185.42,43.68 D238.2@-204.343,43.68 D239.2@-223.393,43.68 D240.2@-241.427,43.68 D241.2@-243.586,43.68 -260.703,43.68 ccw(c-260.703,41.14) -262.499,42.936 -262.654,42.781 cw(c-264.45,44.577) -264.45,42.037 -269.317,42.037 cw(c-269.317,44.577) -271.113,42.781 D242.2@-272.163,43.831
row4: D243.2 D244.2 D245.2 D246.2 D247.2 D248.2 D249.2 D250.2 D251.2 D252.2 D253.2 D254.2 D255.2 D256.2 U301.12 | length 521.9
  Component Side w0.254: -273.399,60.745 cw(c-275.515,62.863) -275.515,59.869 -278.593,59.869 ccw(c-278.593,57.846) -280.616,57.846 -280.616,54.102 ccw(c-277.749,54.102) -277.749,51.235 -276.098,51.235 cw(c-276.098,48.241) -273.104,48.241 -273.104,35.748 cw(c-275.644,35.748) -274.443,33.51 cw(c-275.644,35.748) -275.644,33.208 -276.58,33.208 ccw(c-276.581,32.954) -276.829,33.008 cw(c-278.39,33.345) -279.95,33.002 ccw(c-280.198,32.947) -280.198,33.201 -280.416,33.201 ccw(c-280.416,31.115) -280.894,33.146 ccw(c-280.416,31.115) -282.502,31.115 -282.502,27.17 ccw(c-279.962,27.17) -279.962,24.63 D256.2@-267.335,24.63 D255.2@-237.109,24.63 D254.2@-234.95,24.63 D253.2@-213.995,24.63 D252.2@-194.945,24.63 D251.2@-175.768,24.63 D250.2@-156.718,24.63 D249.2@-137.668,24.63 D248.2@-118.618,24.63 D247.2@-99.695,24.63 D246.2@-80.645,24.63 D245.2@-61.595,24.63 D243.2@-43.561,24.63 D244.2@-41.468,24.63 ; -273.398,60.746 -273.265,60.879 cw(c-271.932,59.546) -271.932,61.431 -250.332,61.431 cw(c-250.332,57.983) -247.894,60.421 -247.148,59.675 ccw(c-244.389,62.434) -247.147,59.674 ccw(c-244.389,62.434) -244.389,58.532 -65.766,58.532 ccw(c-65.766,62.434) -63.008,59.674 ccw(c-65.766,62.434) -63.007,59.675 -60.669,62.013 cw(c-58.873,60.217) -58.873,62.757 -53.377,62.757 cw(c-53.377,60.345) -51.672,62.051 cw(c-53.377,60.345) U301.12@-51.671,62.05 ccw(c-51.159,62.05) -51.521,61.688 U301.12@-50.504,60.672
row5: D257.2 D258.2 D259.2 D260.2 D261.2 D262.2 D263.2 D264.2 D265.2 D266.2 U301.11 | length 545.3
  Component Side w0.254: -273.425,61.361 -273.558,61.228 cw(c-275.743,63.413) -273.559,61.227 cw(c-275.743,63.413) -275.743,60.323 -278.781,60.323 ccw(c-278.781,58.034) -281.07,58.034 -281.07,54.102 ccw(c-277.749,54.102) -277.749,50.781 -276.098,50.781 cw(c-276.098,48.241) -273.558,48.241 -273.558,35.748 cw(c-275.644,35.748) -274.172,34.27 cw(c-275.644,35.748) -275.644,33.662 -276.825,33.662 ccw(c-278.39,33.345) -279.911,33.832 cw(c-280.153,33.909) -280.153,33.655 -280.416,33.655 ccw(c-280.416,31.115) -282.956,31.115 -282.956,8.12 ccw(c-280.416,8.12) -280.416,5.58 D265.2@-237.617,5.58 D266.2@-235.458,5.58 D264.2@-215.265,5.58 D263.2@-213.233,5.58 ccw(c-210.701,5.58) -210.701,3.048 -204.125,3.048 ccw(c-204.125,5.588) -202.329,3.792 -201.785,4.336 cw(c-199.989,2.54) -199.989,5.08 -157.694,5.08 ccw(c-157.694,7.58) D262.2@-155.194,7.58 D261.2@-153.162,7.58 ccw(c-150.662,7.58) -150.662,5.08 -121.321,5.08 ccw(c-121.321,7.62) -119.525,5.824 -118.219,7.13 cw(c-116.423,5.334) -116.423,7.874 -111.669,7.874 cw(c-111.669,5.334) -109.873,7.13 -108.44,5.697 ccw(c-106.644,7.493) -106.644,4.953 -79.792,4.953 cw(c-79.792,2.413) -77.996,4.209 -77.706,3.919 ccw(c-75.91,5.715) -75.91,3.175 -73.906,3.175 ccw(c-73.906,5.58) D260.2@-71.501,5.58 D259.2@-69.342,5.58 D257.2@-49.469,5.58 D258.2@-47.437,5.58 ; -273.424,61.362 cw(c-272.16,60.096) -272.16,61.885 -250.332,61.885 cw(c-250.332,57.983) -247.574,60.743 cw(c-250.332,57.983) -247.573,60.742 -246.827,59.996 ccw(c-244.389,62.434) -244.389,58.986 -66.142,58.986 ccw(c-66.142,63.342) -63.062,60.262 -60.99,62.334 ; -60.989,62.335 cw(c-58.873,60.217) -58.873,63.211 -52.541,63.211 cw(c-52.541,61.18) U301.11@-51.105,62.616 ; U301.11@-51.105,62.616 -50.91,62.421 cw(c-51.481,61.849) -50.673,61.849 ccw(c-49.945,61.849) -50.46,61.334 U301.11@-50.151,61.025
RST: CON303.2 CON305.5 R301.2 S301.2 S302.2 U301.24 | length 175.5
  Component Side w0.254: CON305.5@-57.277,56.261 -57.277,55.245 v1(-57.15,55.118) ; v1(-53.467,48.514) cw(c-51.321,48.514) -52.838,50.032 v1(-51.435,51.435) R301.2@-50.053,51.435 ; U301.24@-49.444,55.863 -49.444,55.128 cw(c-51.254,55.128) U301.24@-49.974,53.848 -49.974,51.514 R301.2@-50.053,51.435 ; CON303.2@-30.607,53.34 ccw(c-30.607,52.36) -31.587,52.36 S301.2@-31.587,50.457 cw(c-31.735,50.457) -31.735,50.309 -36.967,50.309 cw(c-36.967,50.563) -37.202,50.466 ccw(c-38.677,49.855) -40.153,50.466 cw(c-40.388,50.563) -40.388,50.309 -48.26,50.309 -48.927,50.309 cw(c-48.927,51.435) R301.2@-50.053,51.435
  Bottom Layer w0.254: S302.2@-111.542,13.19 -111.542,9.017 ccw(c-109.002,9.017) -109.002,6.477 -79.502,6.477 cw(c-79.502,4.445) -77.47,4.445 ccw(c-75.946,4.445) -75.946,2.921 -47.244,2.921 ccw(c-47.244,5.461) -44.704,5.461 -44.704,31.751 cw(c-42.164,31.751) -42.676,34.239 -41.989,34.239 ccw(c-41.989,36.779) -41.477,34.291 ccw(c-41.989,36.779) -39.501,36.267 ccw(c-41.989,36.779) -39.449,36.779 -39.449,38.786 ccw(c-42.004,38.786) -39.505,39.316 ccw(c-42.004,38.786) -41.474,41.285 ccw(c-42.004,38.786) -42.004,41.341 -50.927,41.341 cw(c-50.927,43.881) -53.467,43.881 v1(-53.467,48.514) ; v1(-57.15,55.118) -54.211,52.179 ccw(c-52.415,53.975) -52.415,51.435 v1(-51.435,51.435)
VCC: C302.2 C303.2 C304.2 C307.2 CON305.2 D303.1 F301.1 R301.1 U301.4 U301.31 U301.32 | length 136.7
  Component Side w0.254: CON305.2@-59.897,57.531 -59.897,58.594 v1(-59.817,58.674) ; v1(-48.895,53.086) -48.895,51.801 -48.641,51.547 R301.1@-48.753,51.435 ; U301.4@-47.11,60.318 -46.093,61.335 cw(c-45.731,60.973) U301.4@-45.731,61.485 v1(-44.704,62.512) C302.2@-44.704,64.374 ; U301.31@-46.403,57.985 U301.32@-46.05,58.338 -45.315,58.338 cw(c-45.315,56.527) U301.32@-44.034,57.808 ; U301.31@-44.6,57.242 U301.32@-44.034,57.808 ; v1@-43.676,58.166 U301.32@-44.034,57.808 ; v1@-43.307,58.166 C303.2@-42.052,58.166 cw(c-41.163,58.166) -41.163,59.055 -34.007,59.055 ccw(c-34.007,61.595) -31.467,61.595 v1(-31.467,71.12) -31.467,78.994 cw(c-28.927,78.994) -28.927,81.534 F301.1@-25.353,81.534 ; D303.1@-11.557,44.172 C307.2@-8.5,44.172 ; v1@-11.049,56.896 -11.04,56.896 cw(c-11.04,54.356) -8.5,54.356 -8.5,51.392 cw(c-8.754,51.391) -8.612,51.18 ccw(c-7.721,49.855) -8.612,48.53 cw(c-8.754,48.319) -8.5,48.318 C307.2@-8.5,44.172 ; C307.2@-8.5,44.15 C307.2@-8.5,44.172
  Bottom Layer w0.254: v1(-48.895,53.086) -51.961,56.152 ccw(c-53.757,54.356) -53.757,56.896 -58.039,56.896 cw(c-58.039,58.674) v1(-59.817,58.674) cw(c-58.758,58.674) -58.758,59.733 -52.444,59.733 ccw(c-52.444,62.273) -50.648,60.477 -49.357,61.768 cw(c-47.561,59.972) -47.561,62.512 v1(-44.704,62.512) -44.704,60.742 ccw(c-42.164,60.742) -43.96,58.946 v1(-43.307,58.293) ; v1(-31.467,71.12) cw(c-31.032,71.12) -31.032,71.555 -23.695,71.555 cw(c-23.695,69.015) -21.155,69.015 -21.155,59.436 ccw(c-18.615,59.436) -18.615,56.896 v1(-10.922,56.896)
pads on no net: CON301. CON301.A8 CON301.B8 CON305.0 D301.1 D301.6 D303. D303.2 S201. S202. S203. S204. S205. S206. S207. S208. S209. S210. S211. S212. S213. S214. S215. S216. S217. S218. S219. S220. S221. S222. S223. S224. S225. S226. S227. S228. S229. S230. S231. S232. S233. S234. S235. S236. S237. S238. S239. S240. S241. S242. S243. S244. S245. S246. S247. S248. S249. S250. S251. S252. S253. S254. S256. S257. S258. S259. S260. S261. S262. S263. S264. S265. S266. S269. S301. S302.
copper on no net: | length 0.8
  Component Side w0.254: -222.033,11.755 -221.463,12.325

## Other copper
Component Side:
  pour cut-out: -182.364,0.288 ccw(c-185.9,-0.519) -189.447,0.242 ccw(c-189.322,0.215) -189.45,0.215 ccw(c-189.322,0.215) -189.322,0.088 -182.533,0.088 ccw(c-182.533,0.215) -182.423,0.15 ccw(c-182.488,0.26)
  pour cut-out: -269.164,0.288 ccw(c-272.7,-0.519) -276.247,0.242 ccw(c-276.122,0.215) -276.25,0.215 ccw(c-276.122,0.215) -276.122,0.088 -269.333,0.088 ccw(c-269.333,0.215) -269.223,0.15 ccw(c-269.288,0.26)
  pour cut-out: -95.564,0.288 ccw(c-99.1,-0.519) -102.647,0.242 ccw(c-102.522,0.215) -102.65,0.215 ccw(c-102.522,0.215) -102.522,0.088 -95.733,0.088 ccw(c-95.733,0.215) -95.623,0.15 ccw(c-95.688,0.26)
  pour cut-out: -8.764,0.288 ccw(c-12.3,-0.519) -15.847,0.242 ccw(c-15.722,0.215) -15.85,0.215 ccw(c-15.722,0.215) -15.722,0.088 -8.933,0.088 ccw(c-8.933,0.215) -8.823,0.15 ccw(c-8.888,0.26)
  pour cut-out: -13.836,94.342 ccw(c-10.3,95.149) -6.753,94.388 ccw(c-6.878,94.415) -6.75,94.415 ccw(c-6.878,94.415) -6.878,94.542 -13.667,94.542 ccw(c-13.667,94.415) -13.777,94.48 ccw(c-13.712,94.37)
  pour cut-out: -102.636,94.342 ccw(c-99.1,95.149) -95.553,94.388 ccw(c-95.678,94.415) -95.55,94.415 ccw(c-95.678,94.415) -95.678,94.542 -102.467,94.542 ccw(c-102.467,94.415) -102.577,94.48 ccw(c-102.512,94.37)
  pour cut-out: -189.436,94.342 ccw(c-185.9,95.149) -182.353,94.388 ccw(c-182.478,94.415) -182.35,94.415 ccw(c-182.478,94.415) -182.478,94.542 -189.267,94.542 ccw(c-189.267,94.415) -189.377,94.48 ccw(c-189.312,94.37)
  pour cut-out: -276.236,94.342 ccw(c-272.7,95.149) -269.153,94.388 ccw(c-269.278,94.415) -269.15,94.415 ccw(c-269.278,94.415) -269.278,94.542 -276.067,94.542 ccw(c-276.067,94.415) -276.177,94.48 ccw(c-276.112,94.37)
  pour cut-out: -4.117,97.055 ccw(c-4.117,95.555) -4.117,94.054 cw(c-4.117,90.555) -0.617,90.555 ccw(c0.883,90.555) 0.883,89.054 ccw(c0.883,90.555) 2.384,90.555 ccw(c-4.117,90.555)
  pour cut-out: 2.44,4.117 ccw(c0.94,4.117) -0.561,4.117 cw(c-4.06,4.117) -4.06,0.617 ccw(c-4.06,-0.883) -5.561,-0.883 ccw(c-4.06,-0.883) -4.06,-2.384 ccw(c-4.06,4.117)
  pour cut-out: -287.043,90.504 ccw(c-285.543,90.504) -284.043,90.504 cw(c-280.543,90.504) -280.543,94.004 ccw(c-280.543,95.504) -279.043,95.504 ccw(c-280.543,95.504) -280.543,97.004 ccw(c-280.543,90.504)
  pour cut-out: -280.49,-2.44 ccw(c-280.49,-0.94) -280.49,0.561 cw(c-280.49,4.06) -283.99,4.06 ccw(c-285.49,4.06) -285.49,5.561 ccw(c-285.49,4.06) -286.991,4.06 ccw(c-280.49,4.06)
Bottom Layer:
  pour cut-out: -280.49,-2.44 ccw(c-280.49,-0.94) -280.49,0.561 cw(c-280.49,4.06) -283.99,4.06 ccw(c-285.49,4.06) -285.49,5.561 ccw(c-285.49,4.06) -286.991,4.06 ccw(c-280.49,4.06)
  pour cut-out: -269.164,0.288 ccw(c-272.7,-0.519) -276.247,0.242 ccw(c-276.122,0.215) -276.25,0.215 ccw(c-276.122,0.215) -276.122,0.088 -269.333,0.088 ccw(c-269.333,0.215) -269.223,0.15 ccw(c-269.288,0.26)
  pour cut-out: -102.636,94.342 ccw(c-99.1,95.149) -95.553,94.388 ccw(c-95.678,94.415) -95.55,94.415 ccw(c-95.678,94.415) -95.678,94.542 -102.467,94.542 ccw(c-102.467,94.415) -102.577,94.48 ccw(c-102.512,94.37)
  pour cut-out: -189.436,94.342 ccw(c-185.9,95.149) -182.353,94.388 ccw(c-182.478,94.415) -182.35,94.415 ccw(c-182.478,94.415) -182.478,94.542 -189.267,94.542 ccw(c-189.267,94.415) -189.377,94.48 ccw(c-189.312,94.37)
  pour cut-out: -276.236,94.342 ccw(c-272.7,95.149) -269.153,94.388 ccw(c-269.278,94.415) -269.15,94.415 ccw(c-269.278,94.415) -269.278,94.542 -276.067,94.542 ccw(c-276.067,94.415) -276.177,94.48 ccw(c-276.112,94.37)
  pour cut-out: -8.764,0.288 ccw(c-12.3,-0.519) -15.847,0.242 ccw(c-15.722,0.215) -15.85,0.215 ccw(c-15.722,0.215) -15.722,0.088 -8.933,0.088 ccw(c-8.933,0.215) -8.823,0.15 ccw(c-8.888,0.26)
  pour cut-out: -13.836,94.342 ccw(c-10.3,95.149) -6.753,94.388 ccw(c-6.878,94.415) -6.75,94.415 ccw(c-6.878,94.415) -6.878,94.542 -13.667,94.542 ccw(c-13.667,94.415) -13.777,94.48 ccw(c-13.712,94.37)
  pour cut-out: -95.564,0.288 ccw(c-99.1,-0.519) -102.647,0.242 ccw(c-102.522,0.215) -102.65,0.215 ccw(c-102.522,0.215) -102.522,0.088 -95.733,0.088 ccw(c-95.733,0.215) -95.623,0.15 ccw(c-95.688,0.26)
  pour cut-out: -182.364,0.288 ccw(c-185.9,-0.519) -189.447,0.242 ccw(c-189.322,0.215) -189.45,0.215 ccw(c-189.322,0.215) -189.322,0.088 -182.533,0.088 ccw(c-182.533,0.215) -182.423,0.15 ccw(c-182.488,0.26)
  pour cut-out: -287.043,90.504 ccw(c-285.543,90.504) -284.043,90.504 cw(c-280.543,90.504) -280.543,94.004 ccw(c-280.543,95.504) -279.043,95.504 ccw(c-280.543,95.504) -280.543,97.004 ccw(c-280.543,90.504)
  pour cut-out: 2.44,4.117 ccw(c0.94,4.117) -0.561,4.117 cw(c-4.06,4.117) -4.06,0.617 ccw(c-4.06,-0.883) -5.561,-0.883 ccw(c-4.06,-0.883) -4.06,-2.384 ccw(c-4.06,4.117)
  pour cut-out: -4.117,97.055 ccw(c-4.117,95.555) -4.117,94.054 cw(c-4.117,90.555) -0.617,90.555 ccw(c0.883,90.555) 0.883,89.054 ccw(c0.883,90.555) 2.384,90.555 ccw(c-4.117,90.555)

## Silkscreen, mask and mechanical layers (free items; w line width, h text height)
Top Overlay:
  lines w0.254: -149.225,16.129 -123.952,16.129 -123.952,22.86 -149.225,22.86 -149.225,16.129
  text "RST" at -34.163,52.959 h0.75
  text "GND" at -26.289,52.959 h0.75
  text "Waffling: adj. or verb - indecisive; unable to make up one's mind; playing the safe middle ground due to one's own lack of conviction or sense of morality." at -246.888,39.497 h2.9
  text "Waffling60" at -148.209,19.304 h5
  text "by 4pplet" at -133.096,17.018 h2
  text "Rev B1" at -148.082,16.891 h2
Bottom Overlay:
  lines w0.2: -31.877,52.07 -26.797,52.07 -26.797,54.61 -31.877,54.61 -31.877,52.07
  text "CON303" at -27.178,55.118 h0.75
  text "RST" at -30.226,51.562 h0.75 r90
  text "GND" at -27.559,51.562 h0.75 r90
  text "RESET" at -112.014,2.921 h0.75
outline:
  lines w0.1: -284.861,36.576 -280.67,36.576 ccw(c-280.67,37.719) -279.527,37.719 -279.527,37.795 ccw(c-280.797,37.795) -280.797,39.065 -284.85,39.065 -284.85,92.415 cw(c-282.85,92.415) -282.85,94.415 -275.85,94.415 ccw(c-272.7,95.149) -269.55,94.415 -189.05,94.415 ccw(c-185.9,95.149) -182.75,94.415 -102.25,94.415 ccw(c-99.1,95.149) -95.95,94.415 -23.553,94.415 ; -284.85,36.565 -284.85,2.215 ccw(c-282.85,2.215) -282.85,0.215 -275.85,0.215 cw(c-272.7,-0.52) -269.55,0.215 -189.05,0.215 cw(c-185.9,-0.52) -182.75,0.215 -102.25,0.215 cw(c-99.1,-0.52) -95.95,0.215 -15.45,0.215 cw(c-12.3,-0.52) -9.15,0.215 -2.15,0.215 ccw(c-2.15,2.215) -0.15,2.215 -0.15,36.576 -0.762,36.576 -4.191,36.576 cw(c-4.191,37.846) -5.461,37.846 cw(c-4.242,37.846) -4.242,39.065 -0.15,39.065 -0.15,92.415 ccw(c-2.15,92.415) -2.15,94.415 -7.15,94.415 ; -24.208,94.415 -13.477,94.415 ccw(c-10.327,95.149) -7.177,94.415
Mechanical 16:
  drawing of 614 lines, arcs and shapes, not listed

## Text inside footprints (layer, text, board x,y; h text height)
CON301: Mechanical 15 "connector edge" at -15.25,95.25 h1 r180
S262: Mechanical 16 "7U" at -208.331,7.365 h1.52 r270; Mechanical 16 "6.25U" at -188.764,5.615 h1.52 r270